# Altium PCB Board.PcbDoc
Units mil, origin at the board's own origin, x right, y up, seen from the top; angles counter-clockwise.
Board outline 1038 x 840 mil, 2 copper layers (Top Layer, Bottom Layer); 8 components, 6 nets, 32 pads, 7 vias.
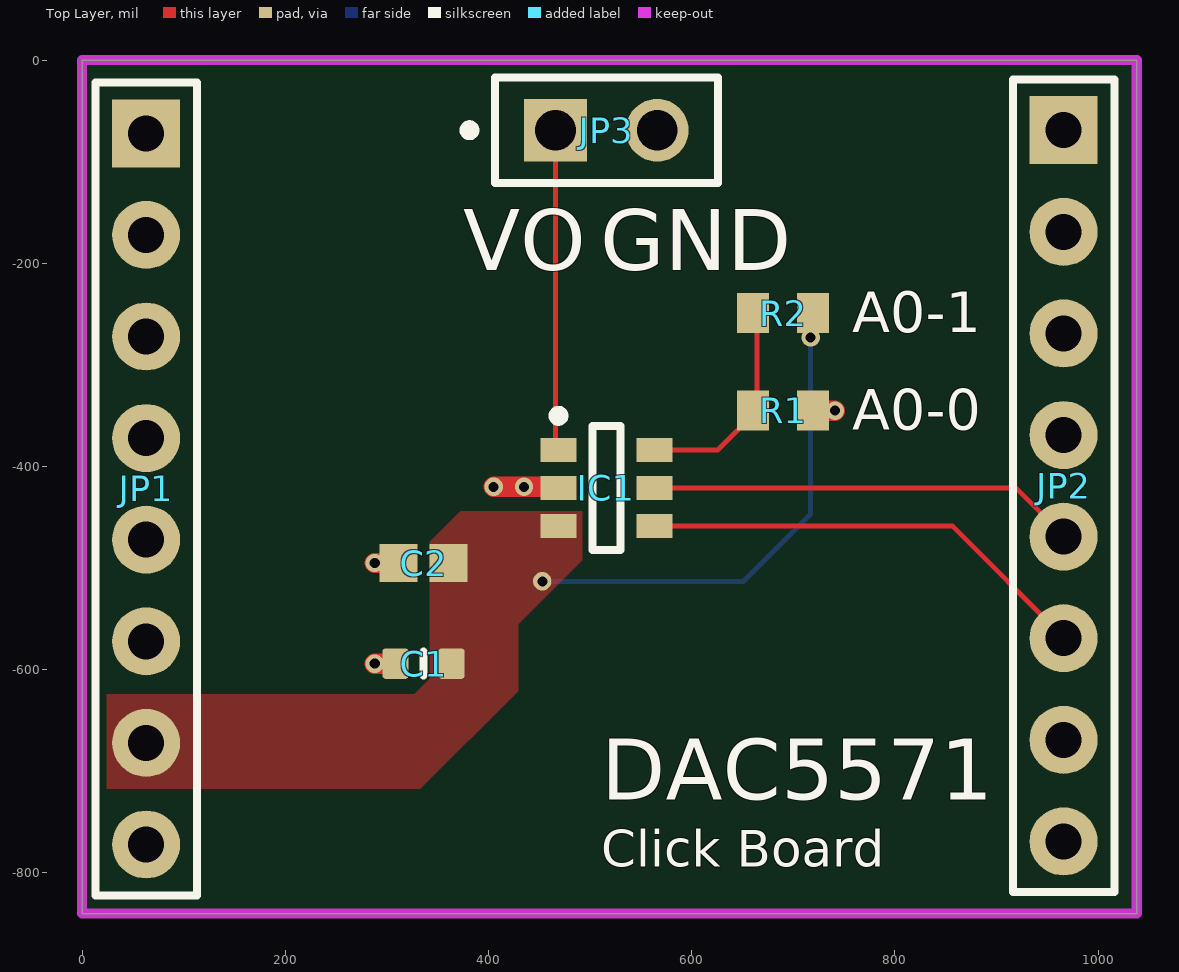
[diagram p0: Top Layer view]
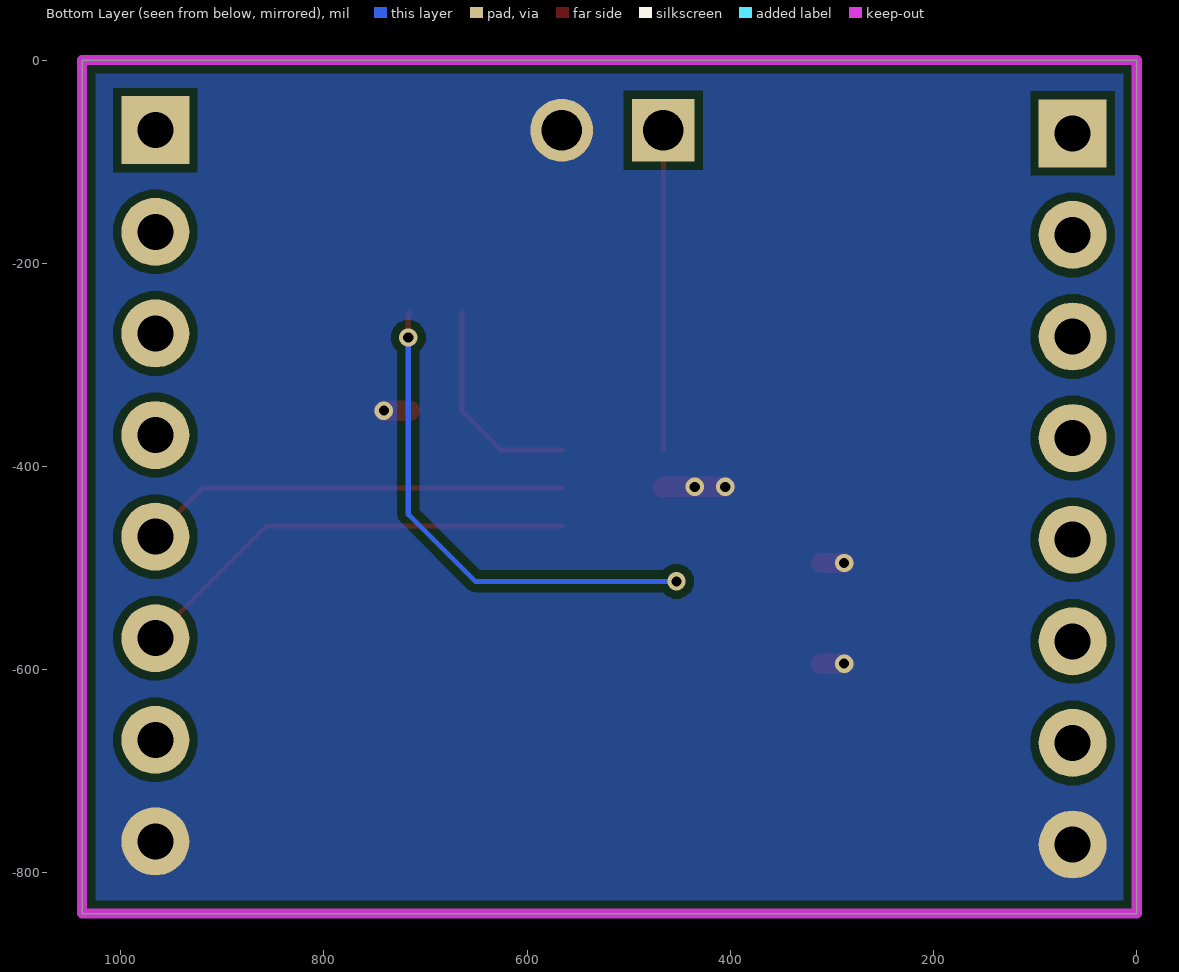
[diagram p1: Bottom Layer view, seen from below]

## Layer stack, top to bottom
Top Solder: solder mask 0.4, Solder Resist, Dk 3.5
Top Layer: signal copper 1.4
Dielectric 1: dielectric 12.6, FR-4, Dk 4.8
Bottom Layer: signal copper 1.4
Bottom Solder: solder mask 0.4, Solder Resist, Dk 3.5

## Board outline
0,-840 0,0 1038,0 1038,-840

## Design rules (kind name [scope] priority, off if disabled: settings)
Clearance [All] p1: gap=8 ignorepadtopadclearanceinfootprint=TRUE
DiffPairsRouting [All] p1: maxlimit=10 minlimit=8 mostfreqgap=8 toplayer_minwidth=5 toplayer_maxwidth=15 toplayer_prefwidth=5 bottomlayer_minwidth=5 bottomlayer_maxwidth=15 bottomlayer_prefwidth=5 maxuncoupledlength=500
PlaneClearance [All] p1: clearance=8
PlaneConnect [All] p1: planeconnectstyle=Direct reliefexpansion=20 reliefentries=4 reliefconductorwidth=10 reliefairgap=10
PolygonConnect [All] p1: connectstyle=Direct reliefconductorwidth=10 reliefentries=4 polygonreliefangle="90 Angle" airgapwidth=10
RoomDefinition Main [InComponentClass('Main')] p1: confinementstyle=ConfineIn formatcopy=TRUE lockcomponents=FALSE outline 2338,-2362 8303,-2362 8303,-1847 2338,-1847
RoutingVias [All] p1: holewidth=10 width=18 viastyle="Through Hole" minholewidth=10 minwidth=18 maxholewidth=10 maxwidth=18
SolderMaskExpansion [IsVia] p1: expansion=4 istentingtop=TRUE
Width [All] p1: maxlimit=20 minlimit=5 preferedwidth=5
27 further rules are at their usual default settings.

## Classes and differential pairs
component class Main: C1 C2 IC1 JP2 JP3 R1 R2

## Components (designator, comment, footprint, x,y, rotation, side; value= is the part's Value field where it differs from the comment)
C1 "Capacitor 10µF +/-20% 10V 0603" CAPC0603(1608)100_L 336,-594 r0 top value=10µF
C2 "Capacitor 100 nF +/-10% 50 V 0603" CAPC1608X90X40NL10T20 336,-495 r0 top value=100nF
IC1 "DAC5571IDBVR" TI-DBV6_L 516,-420.95 r0 top
JP1 "1-87220-8" 1-87220-8-Footprint-1 63,-72 r0 top
JP2 "1-87220-8" 1-87220-8-Footprint-1 966,-69 r0 top
JP3 "M20-9990246" FP-M20-9990246-MFG 516,-69 r0 top
R1 "Resistor 100k +/-1% 0603 100 mW" RESC1608X55X25ML10T15 690,-345 r0 top value=0
R2 "Resistor 100k +/-1% 0603 100 mW" RESC1608X55X25ML10T15 690,-249 r0 top value=0

## Footprints (in the part's own frame and the unit in brackets; to place one, negate y for a bottom-side part, rotate by r counter-clockwise, add the part's x,y. Pads: shape width x height; smd on the part's side, far side on the other; paste and mask are expansions set on the pad)
1-87220-8-Footprint-1 [mm]
  rect 1.7x1.7 hole 0.9: 1(0,0)
  round 1.7 hole 0.9: 2(0,-2.54) 3(0,-5.08) 4(0,-7.62) 5(0,-10.16) 6(0,-12.7) 7(0,-15.24) 8(0,-17.78)
  silkscreen extent -1.27,-19.05 1.27,1.27, body extent -1.27,-19.05 1.27,1.27, height 2.54
CAPC0603(1608)100_L [mm] "Chip Capacitor, Body 1.6x0.8mm, Height 1.0mm, IPC High Density"
  rrect25% 0.66x0.76 smd: 1(-0.7,0) 2(0.7,0)
  silkscreen extent 0,-0.3 0,0.3, body extent -0.8,-0.4 0.8,0.4, height 0.95
CAPC1608X90X40NL10T20 [mm] "Chip Capacitor, 2-Leads, Body 1.70x0.90mm, IPC Medium Density"
  rect 0.95x0.95 smd: 1(-0.625,0) 2(0.625,0)
  body extent -0.85,-0.45 0.85,0.45, height 0.9
FP-M20-9990246-MFG [mm]
  rect 1.57x1.57 hole 1.02 paste-1000 mask+0: 1(-1.27,0)
  round 1.57 hole 1.02 paste-1000 mask+0: 2(1.27,0)
  silkscreen extent -3.55,-1.32 2.79,1.32, body extent -2.89,-1.42 2.89,1.42, height 0.25
RESC1608X55X25ML10T15 [mm] "Chip Resistor, 2-Leads, Body 1.70x0.90mm, IPC Low Density"
  rect 0.8x1 smd: 1(-0.75,0) 2(0.75,0)
  body extent -0.85,-0.45 0.85,0.45, height 0.55
TI-DBV6_L [mm] "SOT23, 6-Leads, Body 2.9x1.6mm, Pitch 0.95mm, IPC High Density"
  rect 0.9x0.6 smd: 1(-1.2,0.95) 2(-1.2,0) 3(-1.2,-0.95) 4(1.2,-0.95) 5(1.2,0) 6(1.2,0.95)
  silkscreen extent -1.32,-1.55 0.35,1.92, body extent -0.87,-1.52 0.87,1.53, height 1.45

## Part data
C1: library part CMP-001-00075-4, "Chip Capacitor, 10µF +/-20%, 10V, 0603, Thickness 1 mm", Case/Package=0603, Max Operating Temperature=85°C, Min Operating Temperature=-55°C, Tolerance=10%, Voltage Rating=10V, Mounting Technology=SMT, Pins=2
C2: library part CMP-001-00017-6, "Chip Capacitor, 100 nF, +/- 10%, 50 V, 0603 (1608 Metric)", Capacitor Type=Ceramic, Case/Package=0603, Max Operating Temperature=125°C, Min Operating Temperature=-55°C, Tolerance=10%, Voltage Rating=50V, Mounting Technology=SM, Pins=2, RoHS Compliant=True
IC1: library part CMP-001-0000-1, "8 Bit Digital to Analog Converter 1 SOT-23-6"
JP1 JP2: library part CMP-002-00072-1, "Conn Unshrouded Header HDR 1x8 POS 2.54mm Solder ST Thru-Hole Carton"
JP3: library part CMP-002-00074-1, "2.54mm (0.1\") Pitch SIL Vertical PC Tail Pin Header, 6.1mm mating pin height, tin, 2 contacts"
R1 R2: library part CMP-009-00023-5, "Chip Resistor, 100 KOhm, +/- 1%, 0.1 W, -55 to 155 degC, 0603 (1608 Metric)", Case/Package=0603, Max Operating Temperature=155°C, Min Operating Temperature=-55°C, Power=100mW, Tolerance=1%, Voltage Rating=50V, Mounting Technology=SM, Pins=2, RoHS Compliant=True

## Via types
v1: diameter 18, hole 10, Top Layer to Bottom Layer, tented both sides, 7 vias

## Nets (pads, with @x,y where several pads share a name; then routed paths per layer and width w, separated by ;. In a path a pad name is that pad's centre, name@x,y a point inside that pad or via, vN(x,y) a via of type N, cw(c..) or ccw(c..) an arc to the next point about the centre after c; other vN are vias at no path point)
A0: IC1.6 R1.1 R2.1 | length 211.2
  Top Layer w5: IC1.6@565.21,-383.55 625.86,-383.55 664.41,-345 R2.1@664.41,-249
GND: C1.1 C2.1 IC1.2 JP1.8 JP2.8 JP3.2 R1.2 | length 132.4
  Top Layer w20: v1(288,-594) C1.1@310.4,-594 ; v1(288,-495) C2.1@310.4,-495 ; v1(405,-420) v1(435,-420) 465.83,-420 IC1.2@466.79,-420.95 ; R1.2@715.59,-345 v1(741,-345)
SCL: IC1.5 JP2.5 | length 420.3
  Top Layer w5: IC1.5@565.21,-420.95 918.95,-420.95 JP2.5@966,-468
SDA: IC1.4 JP2.6 | length 446.2
  Top Layer w5: IC1.4@565.21,-458.35 856.35,-458.35 JP2.6@966,-568
VDD: C1.2 C2.2 IC1.3 JP1.7 R2.2 | length 489.9
  Top Layer w5: R2.2@715.59,-249 717,-250.42 v1(717,-273)
  Bottom Layer w5: v1(453,-513) 651,-513 717,-447 v1(717,-273)
VOUT: IC1.1 JP3.1 | length 314.9
  Top Layer w5: JP3.1 466,-382.76 IC1.1@466.79,-383.55
pads on no net: JP1.1 JP1.2 JP1.3 JP1.4 JP1.5 JP1.6 JP2.1 JP2.2 JP2.3 JP2.4 JP2.7

## Polygon pours and split planes (outlines as drawn)
VDD on Top Layer "VDD_L01_P000" (solid, pour order 0): 24,-624 327,-624 342,-609 342,-474 372,-444 492,-444 492,-492 429,-555 429,-621 333,-717 24,-717
GND on Bottom Layer "GND_L02_P001" (solid, remove dead copper, pour order 1): -72,51 -69,54 1086,54 1086,-924 -81,-924

## Keep-outs
Keep-Out Layer:
  the board outline again, w10

## Silkscreen, mask and mechanical layers (free items; w line width, h text height)
Top Overlay:
  text "VO" at 375,-207 h60
  text "GND" at 510,-207 h60
  text "A0-1" at 758,-268 h40
  text "A0-0" at 758,-364 h40
  text "DAC5571" at 511,-728 h60
  text "Click Board" at 511,-794 h36
Mechanical 1:
  the board outline again, w10